# EAGLE board fio_4x4 (EAGLE 4.16)
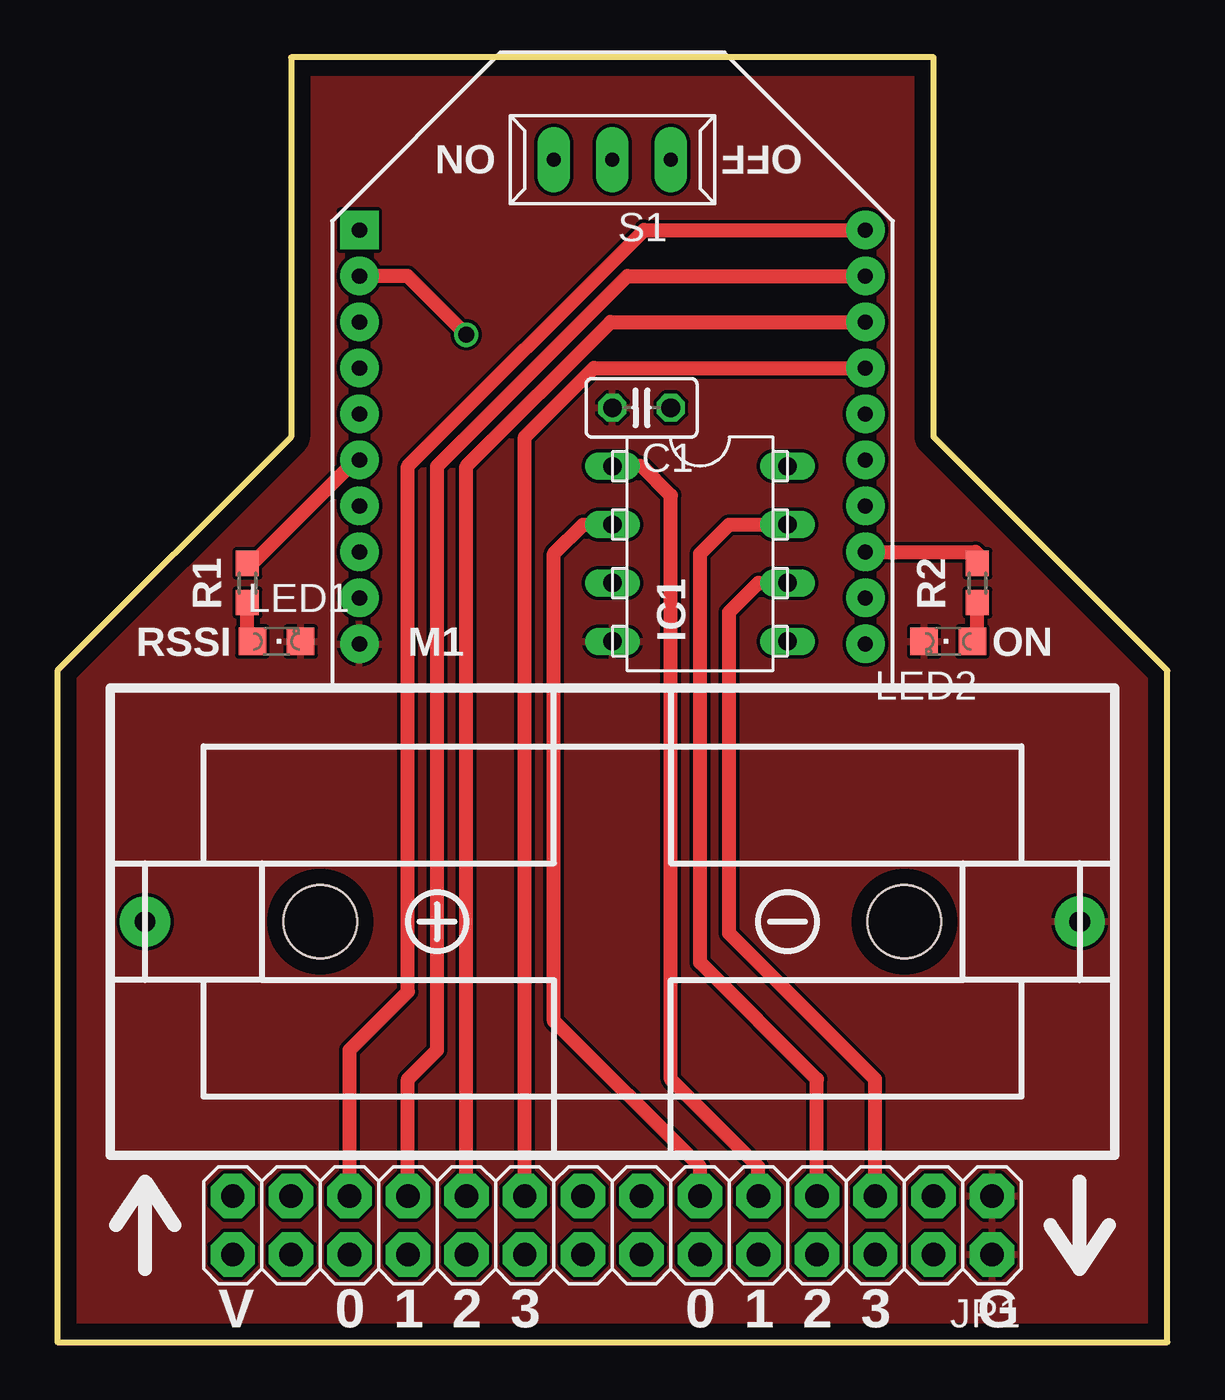
[diagram p0: board, top side]
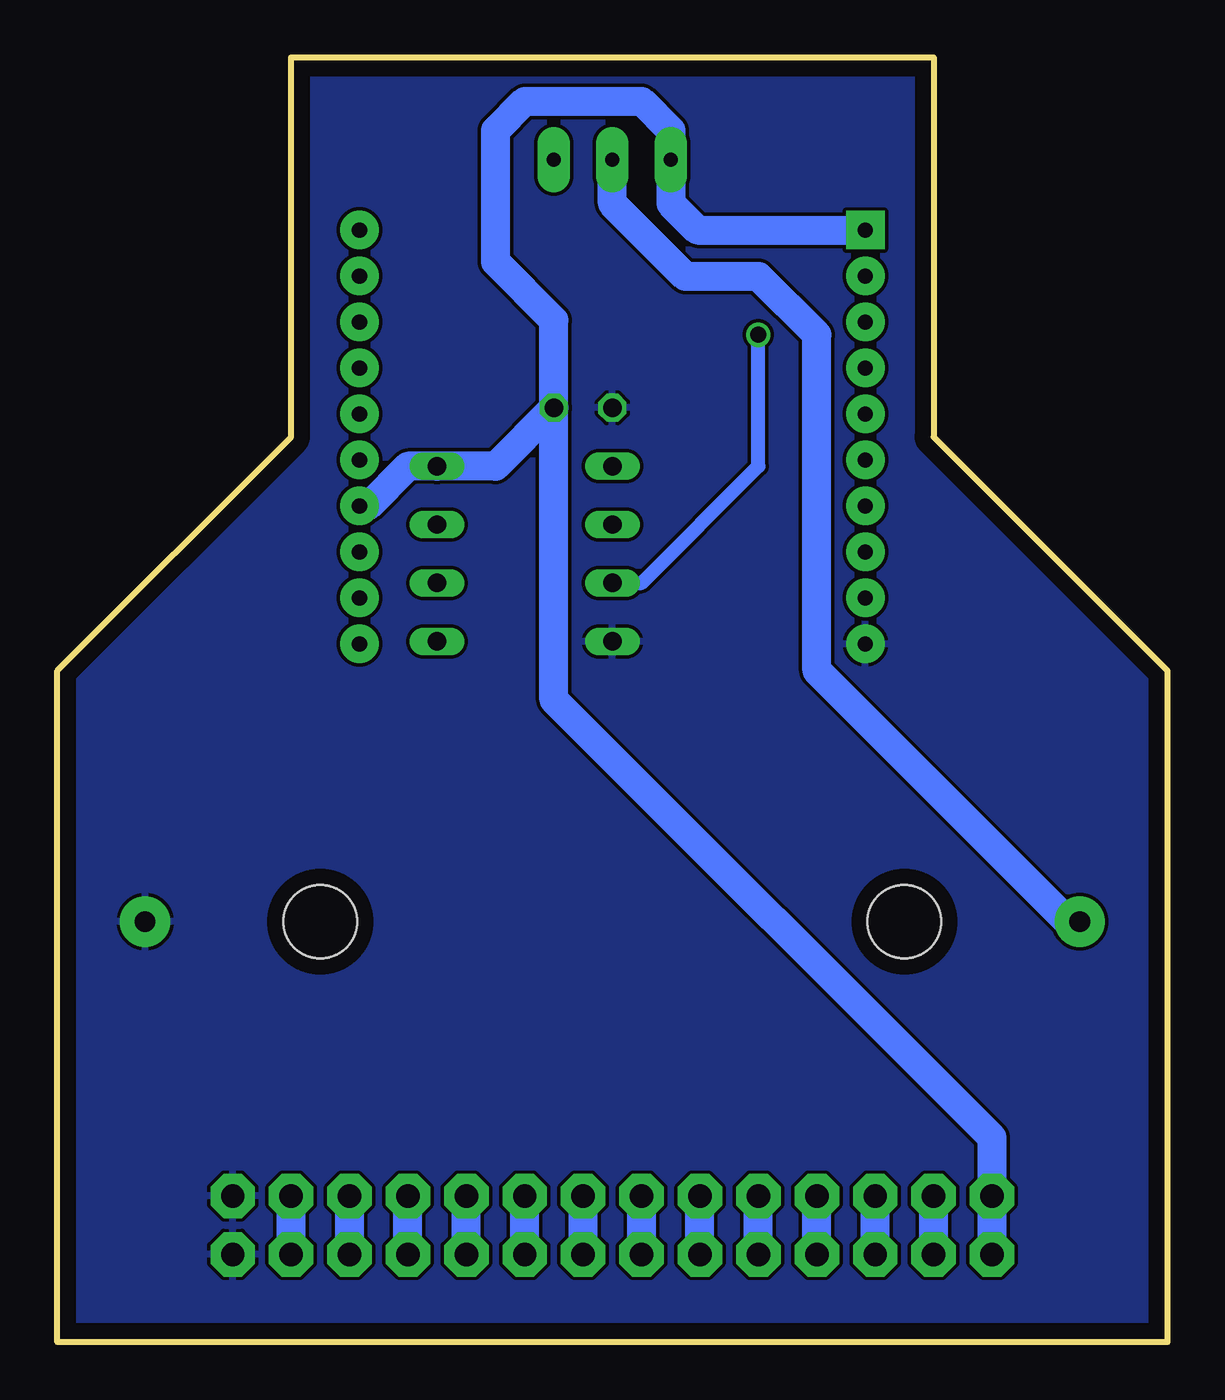
[diagram p1: board, bottom side, seen from below]

Size 48.26 x 55.88 mm. Coordinates in mm from the lower left corner, seen from the top.
Outline: 10.16,55.88 10.16,39.37 0,29.21 0,0 48.26,0 48.26,29.21 38.1,39.37 38.1,55.88 10.16,55.88
Copper layers (1*16): Top 0.035mm / dielectric 1.5mm / Bottom 0.035mm
Design rules "p-ban_min": minimum track width 0.15mm, minimum drill 0.3mm, track to track 0.15mm, track to pad 0.15mm, pad to pad 0.15mm, via to via 0.15mm, smd to smd 0.15mm, copper to edge 0.7mm, drill to drill 0.45mm, minimum pad ring 0.15mm, minimum via ring 0.15mm, stop-mask expansion 4mil, vias tented up to drill 0mil, thermal gap 0.15mm

## Footprints (pad centres in the part's own frame; a part is rotated, then mirrored left to right if it is on the bottom)
C025-025X050 = drill 0.813 octagon: 1 -1.27,0; 2 1.27,0
CR123A-PC = drill 0.9 pad 2.184 round: + -20.32,0; - 20.32,0 | hole 3.2: 12.7,0; -12.7,0
PDIP8 = drill 0.8 long: 1 -3.81,3.81; 2 -3.81,1.27; 3 -3.81,-1.27; 4 -3.81,-3.81; 5 3.81,-3.81; 6 3.81,-1.27; 7 3.81,1.27; 8 3.81,3.81
2X14 = drill 1.016 pad 1.93 octagon: 1 -16.51,-1.27; 2 -16.51,1.27; 3 -13.97,-1.27; 4 -13.97,1.27; 5 -11.43,-1.27; 6 -11.43,1.27; 7 -8.89,-1.27; 8 -8.89,1.27; 9 -6.35,-1.27; 10 -6.35,1.27; 11 -3.81,-1.27; 12 -3.81,1.27; 13 -1.27,-1.27; 14 -1.27,1.27; 15 1.27,-1.27; 16 1.27,1.27; 17 3.81,-1.27; 18 3.81,1.27; 19 6.35,-1.27; 20 6.35,1.27; 21 8.89,-1.27; 22 8.89,1.27; 23 11.43,-1.27; 24 11.43,1.27; 25 13.97,-1.27; 26 13.97,1.27; 27 16.51,-1.27; 28 16.51,1.27
CHIPLED_0805 = smd 1.2 x 1.2: A 0,-1.05; C 0,1.05
XBEE = drill 0.66 pad 1.676 square: 1 -11,9 | drill 0.66 pad 1.676 round: 2 -11,7; 3 -11,5; 4 -11,3; 5 -11,1; 6 -11,-1; 7 -11,-3; 8 -11,-5; 9 -11,-7; 10 -11,-9; 11 11,-9; 12 11,-7; 13 11,-5; 14 11,-3; 15 11,-1; 16 11,1; 17 11,3; 18 11,5; 19 11,7; 20 11,9
R0603 = smd 1.1 x 1: 1 -0.85,0; 2 0.85,0
DS-3 = drill 0.61 pad 1.422 long: 1 0,-2.54; 2 0,0; 3 0,2.54

## Placement (x,y rotation side)
C1  [C025-025X050]  25.4,40.64 180 top
G1  CR123A-PC  [CR123A-PC]  24.13,18.29 0 top
IC1  CY8C27143-24PXI  [PDIP8]  27.94,34.29 0 top
JP1  [2X14]  24.13,5.08 180 top
LED1  [CHIPLED_0805]  9.53,30.48 270 top
LED2  [CHIPLED_0805]  38.73,30.48 90 top
M1  XBEE  [XBEE]  24.13,39.37 0 top
R1  1k  [R0603]  8.25,33.02 90 top
R2  1k  [R0603]  40,33.02 90 top
S1  [DS-3]  24.13,51.43 90 top

## Library data of the parts
C1 R1 R2 = rcl
G1 = takachi
IC1 = cypress_psoc
JP1 = pinhead
LED1 LED2 = led
M1 = xbee_r1
S1 = 1-sw

## Nets
+3V3: C1.1 IC1.8 JP1.27 JP1.28 M1.1 M1.14 S1.3
GND: C1.2 G1.- IC1.4 JP1.1 JP1.2 LED1.C LED2.C M1.10
N$1: JP1.23 JP1.24 M1.20
N$2: JP1.21 JP1.22 M1.19
N$3: JP1.19 JP1.20 M1.18
N$4: JP1.17 JP1.18 M1.17
N$5: JP1.25 JP1.26
N$6: JP1.15 JP1.16
N$7: JP1.13 JP1.14
N$8: IC1.2 JP1.11 JP1.12
N$9: IC1.1 JP1.9 JP1.10
N$10: IC1.7 JP1.7 JP1.8
N$11: IC1.6 JP1.5 JP1.6
N$12: JP1.3 JP1.4
N$13: IC1.3 M1.2
N$14: M1.6 R1.2
N$15: LED1.A R1.1
N$16: M1.13 R2.2
N$17: LED2.A R2.1
N$20: G1.+ S1.2

## Tracks (layer width: path | path; a pad name or v marks a point on that pad's centre or on a via)
+3V3
  Bottom 1.27: 21.59,52.07 21.59,52.71 22.86,53.98 27.94,53.98 29.21,52.71 29.21,46.99 26.67,44.45 C1.1 | 21.59,52.07 S1.3 | C1.1 29.21,38.1 IC1.8 33.02,38.1 34.75,36.37 M1.14 | C1.1 26.67,27.94 7.62,8.89 JP1.27 JP1.28 | M1.1 20.43,48.37 21.59,49.53 21.59,52.07
GND
  pour Top: -2.54,57.15 49.53,57.15 49.53,-1.27 -2.54,-1.27
  pour Bottom: -2.54,58.42 50.8,58.42 50.8,-2.54 -2.54,-2.54
N$1
  Top 0.61: M1.20 25.51,48.37 15.24,38.1 15.24,15.24 12.7,12.7 JP1.23
  Bottom 1.27: JP1.24 JP1.23
N$2
  Top 0.61: JP1.21 15.24,11.43 16.51,12.7 16.51,38.1 24.78,46.37 M1.19
  Bottom 1.27: JP1.22 JP1.21
N$3
  Top 0.61: M1.18 24.05,44.37 17.78,38.1 JP1.19
  Bottom 1.27: JP1.20 JP1.19
N$4
  Top 0.61: M1.17 23.32,42.37 20.32,39.37 JP1.17
  Bottom 1.27: JP1.18 JP1.17
N$5
  Bottom 1.27: JP1.26 JP1.25
N$6
  Bottom 1.27: JP1.16 JP1.15
N$7
  Bottom 1.27: JP1.14 JP1.13
N$8
  Top 0.61: JP1.11 27.94,7.62 21.59,13.97 21.59,34.29 22.86,35.56 IC1.2
  Bottom 1.27: JP1.12 JP1.11
N$9
  Top 0.61: JP1.9 30.48,7.62 26.67,11.43 26.67,36.83 25.4,38.1 IC1.1
  Bottom 1.27: JP1.10 JP1.9
N$10
  Top 0.61: JP1.7 33.02,11.43 27.94,16.51 27.94,34.29 29.21,35.56 IC1.7
  Bottom 1.27: JP1.8 JP1.7
N$11
  Top 0.61: JP1.5 35.56,11.43 29.21,17.78 29.21,31.75 30.48,33.02 IC1.6
  Bottom 1.27: JP1.6 JP1.5
N$12
  Bottom 1.27: JP1.4 JP1.3
N$13  (via drill 0.7)
  Top 0.61: M1.2 15.23,46.37 v17.78,43.82
  Bottom 0.61: IC1.3 22.86,33.02 17.78,38.1 v17.78,43.82
N$14
  Top 0.61: M1.6 12.97,38.37 8.47,33.87 R1.2
N$15
  Top 0.61: LED1.A 8.25,30.48 R1.1
N$16
  Top 0.61: R2.2 40,34.29 39.92,34.37 M1.13
N$17
  Top 0.61: LED2.A 40,30.48 R2.1
N$20
  Bottom 1.27: G1.+ 4.32,18.29 15.24,29.21 15.24,43.82 17.78,46.35 20.96,46.35 24.13,49.53 S1.2

## Text on the board
tPlace: ON | OFF
tNames: RSSI | ON | V | 0 | 1 | 2 | 3 | 0 | 1 | 2 | 3 | G